# Altium PCB Y1BVER2.0.PcbDoc
Units mm, origin at the board's own origin, x right, y up, seen from the top; angles counter-clockwise.
Board outline 152.4 x 101.6 mm, 2 copper layers (Top Layer, Bottom Layer); 302 components, 252 nets, 1277 pads, 0 vias.
Unrouted connection lines stored in the file: 838.
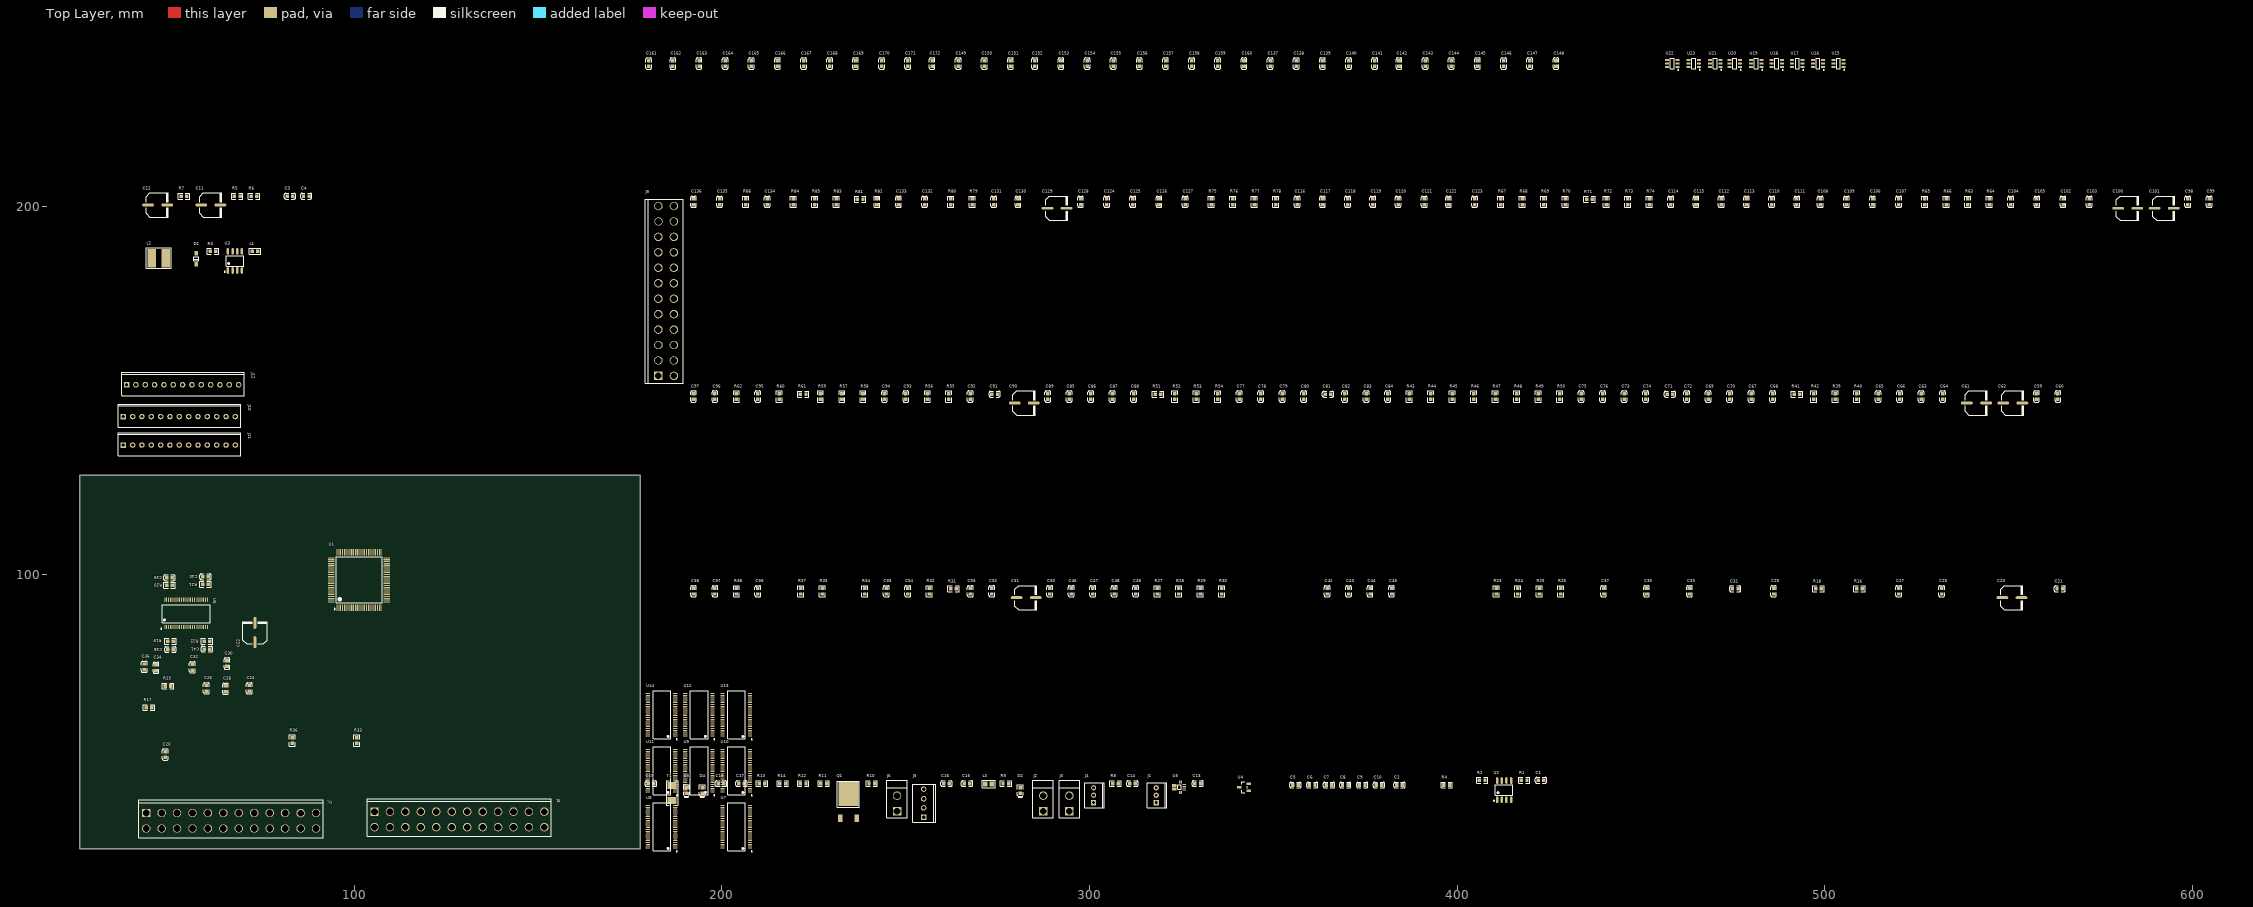
[diagram p0: Top Layer view]
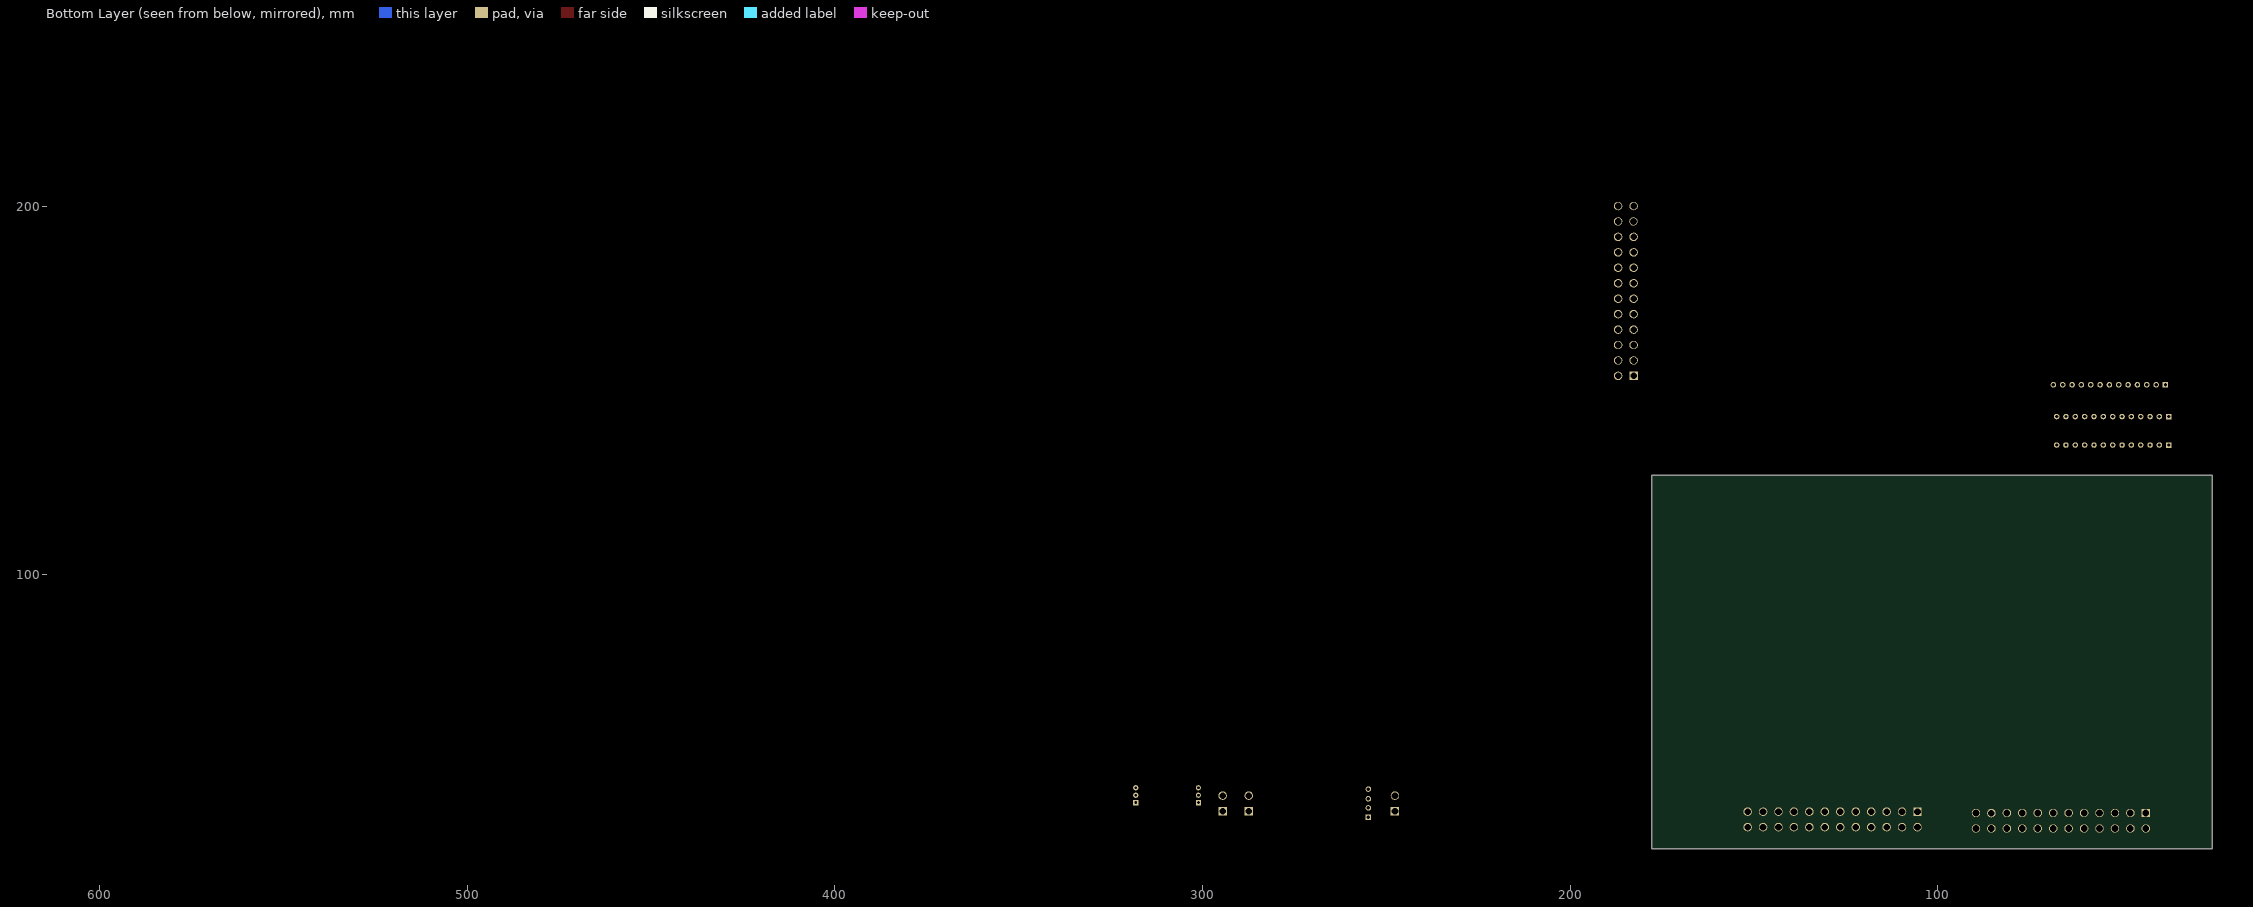
[diagram p1: Bottom Layer view, seen from below]

## Layer stack, top to bottom
Top Layer: signal copper 0.0356
Dielectric: dielectric 0.32, FR-4, Dk 4.8
Bottom Layer: signal copper 0.0356

## Board outline
25.4,25.4 177.8,25.4 177.8,127 25.4,127

## Design rules (kind name [scope] priority, off if disabled: settings)
Clearance [All] p1: gap=0.254
PolygonConnect [All] p1: connectstyle=Relief reliefconductorwidth=0.254 reliefentries=4 polygonreliefangle="90 Angle"
RoutingVias [All] p1: holewidth=0.711 width=1.27 viastyle="Through Hole" minholewidth=0.711 minwidth=1.27 maxholewidth=0.711 maxwidth=1.27
SilkscreenOverComponentPads [All] p1: minsilkscreentomaskgap=0.254
SolderMaskExpansion [All] p1: expansion=0.102
Width [All] p1: maxlimit=0.254 minlimit=0.254 preferedwidth=0.254
27 further rules are at their usual default settings.

## Classes and differential pairs
component class Y1BVER2.0: C1 C2 C3 C4 C5 C6 C7 C8 C9 C10 C11 C12 C13 C14 C15 C16 C17 C18 C19 D1 D2 D3 D4 J1 J2 J3 J4 J5 J6 L1 L2 L3 Q1 R1 R2 R3 R4 R5 R6 R7 R8 R9 R10 R11 R12 R13 R14 U1 U2 U3 U4 U5 Y1
component class Y1BVER2.0_4: C137 C138 C139 C140 C141 C142 C143 C144 C145 C146 C147 C148 C149 C150 C151 C152 C153 C154 C155 C156 C157 C158 C159 C160 C161 C162 C163 C164 C165 C166 C167 C168 C169 C170 C171 C172 J10 J11 J12 U15 U16 U17 U18 U19 U20 U21 U22 U23
component class Y1BVER2.0_3: C98 C99 C100 C101 C102 C103 C104 C105 C106 C107 C108 C109 C110 C111 C112 C113 C114 C115 C116 C117 C118 C119 C120 C121 C122 C123 C124 C125 C126 C127 C128 C129 C130 C131 C132 C133 C134 C135 C136 J9 R63 R64 R65 R66 R67 R68 R69 R70 R71 R72 R73 R74 R75 R76 R77 R78 R79 R80 R81 R82 R83 R84 R85 R86 U12 U13 U14
component class Y1BVER2.0_2: C59 C60 C61 C62 C63 C64 C65 C66 C67 C68 C69 C70 C71 C72 C73 C74 C75 C76 C77 C78 C79 C80 C81 C82 C83 C84 C85 C86 C87 C88 C89 C90 C91 C92 C93 C94 C95 C96 C97 J8 R39 R40 R41 R42 R43 R44 R45 R46 R47 R48 R49 R50 R51 R52 R53 R54 R55 R56 R57 R58 R59 R60 R61 R62 U9 U10 U11
component class Y1BVER2.0_1: C20 C21 C22 C23 C24 C25 C26 C27 C28 C29 C30 C31 C32 C33 C34 C35 C36 C37 C38 C39 C40 C41 C42 C43 C44 C45 C46 C47 C48 C49 C50 C51 C52 C53 C54 C55 C56 C57 C58 J7 R15 R16 R17 R18 R19 R20 R21 R22 R23 R24 R25 R26 R27 R28 R29 R30 R31 R32 R33 R34 R35 R36 R37 R38 U6 U7 U8

## Components (designator, comment, footprint, x,y, rotation, side; value= is the part's Value field where it differs from the comment)
C1 "100nF" 0603_C 422.783,44.069 r0 top
C2 "100nF" 0603_C 384.302,42.799 r0 top
C3 "10uF" 0603_C 82.55,202.946 r0 top
C4 "470pF" 0603_C 86.995,202.946 r0 top
C5 "100nF" 0603_C 355.981,42.799 r0 top
C6 "100nF" 0603_C 360.553,42.799 r0 top
C7 "100nF" 0603_C 365.125,42.799 r0 top
C8 "100nF" 0603_C 369.57,42.799 r0 top
C9 "100nF" 0603_C 374.142,42.799 r0 top
C10 "100nF" 0603_C 378.714,42.799 r0 top
C11 "100uf" E_6.3*5.4 58.42,200.533 r0 top
C12 "C" E_6.3*5.4 43.942,200.533 r0 top
C13 "100nF" 0603_C 329.438,43.18 r0 top
C14 "100nF" 0603_C 311.658,43.18 r0 top
C15 "10uF" 0603_C 266.7,43.18 r0 top
C16 "100nF" 0603_C 261.112,43.18 r0 top
C17 "22pF" 0603_C 205.359,43.18 r0 top
C18 "10nF" 0603_C 199.771,43.18 r0 top
C19 "22pF" 0603_C 180.721,43.18 r0 top
C20 "100nF" 0603_C 48.641,51.054 r90 top
C21 "100nF" 0603_C 563.88,96.139 r0 top
C22 "100uf" E_6.3*5.4 73.025,81.661 r90 top
C23 "100uf" E_6.3*5.4 548.259,93.726 r0 top
C24 "100nF" 0603_C 71.501,69.088 r90 top
C25 "100nF" 0603_C 531.749,95.504 r90 top
C26 "100nF" 0603_C 59.817,69.088 r90 top
C27 "100nF" 0603_C 520.065,95.504 r90 top
C28 "100nF" 0603_C 65.024,68.961 r90 top
C29 "100nF" 0603_C 486.029,95.504 r90 top
C30 "100nF" 0603_C 65.405,75.819 r90 top
C31 "100nF" 0603_C 475.615,96.139 r0 top
C32 "470nF" 0603_C 56.007,74.803 r90 top
C33 "470nF" 0603_C 463.169,95.504 r90 top
C34 "100nF" 0603_C 46.101,74.676 r90 top
C35 "100nF" 0603_C 451.485,95.504 r90 top
C36 "100nF" 0603_C 42.926,74.93 r90 top
C37 "100nF" 0603_C 439.801,95.504 r90 top
C38 "100nF" 0603_C 50.038,79.629 r180 top
C39 "100nF" 0603_C 49.784,99.187 r180 top
C40 "100nF" 0603_C 59.563,99.441 r180 top
C41 "100nF" 0603_C 59.952,79.756 r180 top
C42 "100nF" 0603_C 364.617,95.504 r90 top
C43 "100nF" 0603_C 370.459,95.504 r90 top
C44 "100nF" 0603_C 376.301,95.504 r90 top
C45 "100nF" 0603_C 382.143,95.504 r90 top
C46 "100nF" 0603_C 295.021,95.504 r90 top
C47 "100nF" 0603_C 300.863,95.504 r90 top
C48 "100nF" 0603_C 306.705,95.504 r90 top
C49 "100nF" 0603_C 312.547,95.504 r90 top
C50 "100nF" 0603_C 289.179,95.504 r90 top
C51 "100uf" E_6.3*5.4 280.162,93.726 r0 top
C52 "100nF" 0603_C 273.431,95.504 r90 top
C53 "100nF" 0603_C 267.589,95.504 r90 top
C54 "100nF" 0603_C 250.571,95.504 r90 top
C55 "100nF" 0603_C 244.729,95.504 r90 top
C56 "470nF" 0603_C 209.804,95.504 r90 top
C57 "100nF" 0603_C 198.12,95.504 r90 top
C58 "100nF" 0603_C 192.278,95.504 r90 top
C59 "100nF" 0603_C 557.53,148.463 r90 top
C60 "100nF" 0603_C 563.372,148.463 r90 top
C61 "100uf" E_6.3*5.4 538.607,146.685 r0 top
C62 "100uf" E_6.3*5.4 548.513,146.685 r0 top
C63 "100nF" 0603_C 526.161,148.463 r90 top
C64 "100nF" 0603_C 532.003,148.463 r90 top
C65 "100nF" 0603_C 514.477,148.463 r90 top
C66 "100nF" 0603_C 520.319,148.463 r90 top
C67 "100nF" 0603_C 479.933,148.463 r90 top
C68 "100nF" 0603_C 485.775,148.463 r90 top
C69 "100nF" 0603_C 468.249,148.463 r90 top
C70 "100nF" 0603_C 474.091,148.463 r90 top
C71 "470nF" 0603_C 457.835,149.098 r0 top
C72 "470nF" 0603_C 462.407,148.463 r90 top
C73 "100nF" 0603_C 445.389,148.463 r90 top
C74 "100nF" 0603_C 451.231,148.463 r90 top
C75 "100nF" 0603_C 433.705,148.463 r90 top
C76 "100nF" 0603_C 439.547,148.463 r90 top
C77 "100nF" 0603_C 340.741,148.463 r90 top
C78 "100nF" 0603_C 346.583,148.463 r90 top
C79 "100nF" 0603_C 352.425,148.463 r90 top
C80 "100nF" 0603_C 358.267,148.463 r90 top
C81 "100nF" 0603_C 364.871,149.098 r0 top
C82 "100nF" 0603_C 369.443,148.463 r90 top
C83 "100nF" 0603_C 375.285,148.463 r90 top
C84 "100nF" 0603_C 381.127,148.463 r90 top
C85 "100nF" 0603_C 294.513,148.463 r90 top
C86 "100nF" 0603_C 300.355,148.463 r90 top
C87 "100nF" 0603_C 306.197,148.463 r90 top
C88 "100nF" 0603_C 312.039,148.463 r90 top
C89 "100nF" 0603_C 288.671,148.463 r90 top
C90 "100uf" E_6.3*5.4 279.654,146.685 r0 top
C91 "100nF" 0603_C 274.193,149.098 r0 top
C92 "100nF" 0603_C 267.589,148.463 r90 top
C93 "100nF" 0603_C 250.063,148.463 r90 top
C94 "100nF" 0603_C 244.221,148.463 r90 top
C95 "470nF" 0603_C 209.804,148.463 r90 top
C96 "100nF" 0603_C 198.12,148.463 r90 top
C97 "100nF" 0603_C 192.278,148.463 r90 top
C98 "100nF" 0603_C 598.678,201.422 r90 top
C99 "100nF" 0603_C 604.52,201.422 r90 top
C100 "100uf" E_6.3*5.4 579.755,199.644 r0 top
C101 "100uf" E_6.3*5.4 589.661,199.644 r0 top
C102 "100nF" 0603_C 564.769,201.422 r90 top
C103 "100nF" 0603_C 571.881,201.422 r90 top
C104 "100nF" 0603_C 550.545,201.422 r90 top
C105 "100nF" 0603_C 557.657,201.422 r90 top
C106 "100nF" 0603_C 512.953,201.422 r90 top
C107 "100nF" 0603_C 520.065,201.422 r90 top
C108 "100nF" 0603_C 498.729,201.422 r90 top
C109 "100nF" 0603_C 505.841,201.422 r90 top
C110 "470nF" 0603_C 485.521,201.422 r90 top
C111 "470nF" 0603_C 492.379,201.422 r90 top
C112 "100nF" 0603_C 471.805,201.422 r90 top
C113 "100nF" 0603_C 478.663,201.422 r90 top
C114 "100nF" 0603_C 458.089,201.422 r90 top
C115 "100nF" 0603_C 464.947,201.422 r90 top
C116 "100nF" 0603_C 356.489,201.422 r90 top
C117 "100nF" 0603_C 363.347,201.422 r90 top
C118 "100nF" 0603_C 370.205,201.422 r90 top
C119 "100nF" 0603_C 377.063,201.422 r90 top
C120 "100nF" 0603_C 383.921,201.422 r90 top
C121 "100nF" 0603_C 391.033,201.422 r90 top
C122 "100nF" 0603_C 397.637,201.422 r90 top
C123 "100nF" 0603_C 404.749,201.422 r90 top
C124 "100nF" 0603_C 304.673,201.422 r90 top
C125 "100nF" 0603_C 311.785,201.422 r90 top
C126 "100nF" 0603_C 318.897,201.422 r90 top
C127 "100nF" 0603_C 326.009,201.422 r90 top
C128 "100nF" 0603_C 297.561,201.422 r90 top
C129 "100uf" E_6.3*5.4 288.544,199.644 r0 top
C130 "100nF" 0603_C 280.543,201.422 r90 top
C131 "100nF" 0603_C 273.939,201.422 r90 top
C132 "100nF" 0603_C 255.143,201.422 r90 top
C133 "100nF" 0603_C 248.031,201.422 r90 top
C134 "470nF" 0603_C 212.344,201.422 r90 top
C135 "100nF" 0603_C 199.39,201.422 r90 top
C136 "100nF" 0603_C 192.278,201.422 r90 top
C137 "100nF" 0603_C 349.123,239.014 r90 top
C138 "100nF" 0603_C 356.235,239.014 r90 top
C139 "100nF" 0603_C 363.347,239.014 r90 top
C140 "100nF" 0603_C 370.459,239.014 r90 top
C141 "100nF" 0603_C 377.571,239.014 r90 top
C142 "100nF" 0603_C 384.175,239.014 r90 top
C143 "100nF" 0603_C 391.287,239.014 r90 top
C144 "100nF" 0603_C 398.399,239.014 r90 top
C145 "100nF" 0603_C 405.511,239.014 r90 top
C146 "100nF" 0603_C 412.623,239.014 r90 top
C147 "100nF" 0603_C 419.735,239.014 r90 top
C148 "100nF" 0603_C 426.847,239.014 r90 top
C149 "100nF" 0603_C 264.287,239.014 r90 top
C150 "100nF" 0603_C 271.399,239.014 r90 top
C151 "100nF" 0603_C 278.511,239.014 r90 top
C152 "100nF" 0603_C 285.115,239.014 r90 top
C153 "100nF" 0603_C 292.227,239.014 r90 top
C154 "100nF" 0603_C 299.339,239.014 r90 top
C155 "100nF" 0603_C 306.451,239.014 r90 top
C156 "100nF" 0603_C 313.563,239.014 r90 top
C157 "100nF" 0603_C 320.675,239.014 r90 top
C158 "100nF" 0603_C 327.787,239.014 r90 top
C159 "100nF" 0603_C 334.899,239.014 r90 top
C160 "100nF" 0603_C 342.011,239.014 r90 top
C161 "100nF" 0603_C 180.086,239.014 r90 top
C162 "100nF" 0603_C 186.69,239.014 r90 top
C163 "100nF" 0603_C 193.802,239.014 r90 top
C164 "100nF" 0603_C 200.914,239.014 r90 top
C165 "100nF" 0603_C 208.026,239.014 r90 top
C166 "100nF" 0603_C 215.138,239.014 r90 top
C167 "100nF" 0603_C 222.25,239.014 r90 top
C168 "100nF" 0603_C 229.362,239.014 r90 top
C169 "100nF" 0603_C 236.347,239.014 r90 top
C170 "100nF" 0603_C 243.459,239.014 r90 top
C171 "100nF" 0603_C 250.571,239.014 r90 top
C172 "100nF" 0603_C 257.175,239.014 r90 top
D1 "B5819W" SOD-123 57.023,185.928 r90 top
D2 "" 0603_LED_S1 281.178,41.275 r90 top
D3 "绿灯 0603" 0603_LED_S1 190.373,41.275 r90 top
D4 "白灯 0603" 0603_LED_S1 194.691,41.275 r90 top
J1 "XH-3" ph3-2.0 318.135,37.973 r90 top
J2 "MOTOR" 5557_a 287.401,35.687 r90 top
J3 "MOTOR" 5557_a 294.513,35.687 r90 top
J4 "XH-3" ph3-2.0 301.117,37.973 r90 top
J5 "header4" xh-4 254.889,34.036 r90 top
J6 "MOTOR" 5557_a 247.65,35.687 r90 top
J7 "header24p" 5557-2*12P 43.434,35.179 r0 top
J8 "header24p" 5557-2*12P 105.537,35.56 r0 top
J9 "header24p" 5557-2*12P 182.753,154.051 r90 top
J10 "header13p" xh-13 37.211,143.002 r0 top
J11 "header13p" xh-13 37.211,135.255 r0 top
J12 "header13p" xh-13 38.1,151.638 r0 top
L1 "10uH ±10%" 0603_L 73.025,187.96 r0 top
L2 "induct" L-5*5*4 44.958,186.055 r0 top
L3 "100uH ±10%" 0805_L 272.542,43.053 r0 top
Q1 "MOSFET_N" TO-252-2 232.156,33.782 r0 top
R1 "4.7KΩ" 0603_R 418.211,44.069 r0 top
R2 "120Ω" 0603_R 406.781,44.069 r0 top
R3 "0.33" 0603_R 61.595,187.96 r0 top
R4 "4.7KΩ" 0603_R 397.129,42.799 r0 top
R5 "1.5KΩ" 0603_R 68.199,202.946 r0 top
R6 "130Ω" 0603_R 72.771,202.946 r0 top
R7 "1KΩ" 0603_R 53.721,202.946 r0 top
R8 "1MΩ" 0603_R 307.086,43.18 r0 top
R9 "3.3KΩ" 0603_R 277.241,43.18 r0 top
R10 "330Ω" 0603_R 240.792,43.18 r0 top
R11 "10KΩ" 0603_R 227.711,43.18 r0 top
R12 "1KΩ" 0603_R 222.123,43.18 r0 top
R13 "1KΩ" 0603_R 210.947,43.18 r0 top
R14 "1KΩ" 0603_R 216.535,43.18 r0 top
R15 "1KΩ" 0603_R 49.403,69.723 r0 top
R16 "1KΩ" 0603_R 509.397,96.139 r0 top
R17 "1KΩ" 0603_R 44.196,63.881 r0 top
R18 "1KΩ" 0603_R 498.221,96.139 r0 top
R19 "1Ω" 0603_R 50.038,81.915 r180 top
R20 "1Ω" 0603_R 49.784,97.155 r180 top
R21 "1Ω" 0603_R 59.563,97.409 r180 top
R22 "1Ω" 0603_R 59.952,81.915 r180 top
R23 "1Ω" 0603_R 410.591,95.504 r90 top
R24 "1Ω" 0603_R 416.433,95.504 r90 top
R25 "1Ω" 0603_R 422.275,95.504 r90 top
R26 "1Ω" 0603_R 428.117,95.504 r90 top
R27 "1Ω" 0603_R 318.389,95.504 r90 top
R28 "1Ω" 0603_R 324.231,95.504 r90 top
R29 "1Ω" 0603_R 330.073,95.504 r90 top
R30 "1Ω" 0603_R 335.915,95.504 r90 top
R31 "1KΩ" 0603_R 263.017,96.139 r0 top
R32 "1KΩ" 0603_R 256.413,95.504 r90 top
R33 "1KΩ" 0603_R 100.711,54.864 r90 top
R34 "1KΩ" 0603_R 238.887,95.504 r90 top
R35 "1KΩ" 0603_R 227.33,95.504 r90 top
R36 "1KΩ" 0603_R 83.185,54.864 r90 top
R37 "1KΩ" 0603_R 221.488,95.504 r90 top
R38 "1KΩ" 0603_R 203.962,95.504 r90 top
R39 "1KΩ" 0603_R 502.793,148.463 r90 top
R40 "1KΩ" 0603_R 508.635,148.463 r90 top
R41 "1KΩ" 0603_R 492.379,149.098 r0 top
R42 "1KΩ" 0603_R 496.951,148.463 r90 top
R43 "1Ω" 0603_R 386.969,148.463 r90 top
R44 "1Ω" 0603_R 392.811,148.463 r90 top
R45 "1Ω" 0603_R 398.653,148.463 r90 top
R46 "1Ω" 0603_R 404.495,148.463 r90 top
R47 "1Ω" 0603_R 410.337,148.463 r90 top
R48 "1Ω" 0603_R 416.179,148.463 r90 top
R49 "1Ω" 0603_R 422.021,148.463 r90 top
R50 "1Ω" 0603_R 427.863,148.463 r90 top
R51 "1Ω" 0603_R 318.643,149.098 r0 top
R52 "1Ω" 0603_R 323.215,148.463 r90 top
R53 "1Ω" 0603_R 329.057,148.463 r90 top
R54 "1Ω" 0603_R 334.899,148.463 r90 top
R55 "1KΩ" 0603_R 261.747,148.463 r90 top
R56 "1KΩ" 0603_R 255.905,148.463 r90 top
R57 "1KΩ" 0603_R 232.664,148.463 r90 top
R58 "1KΩ" 0603_R 238.379,148.463 r90 top
R59 "1KΩ" 0603_R 226.822,148.463 r90 top
R60 "1KΩ" 0603_R 215.646,148.463 r90 top
R61 "1KΩ" 0603_R 222.123,149.098 r0 top
R62 "1KΩ" 0603_R 203.962,148.463 r90 top
R63 "1KΩ" 0603_R 538.861,201.422 r90 top
R64 "1KΩ" 0603_R 544.703,201.422 r90 top
R65 "1KΩ" 0603_R 527.177,201.422 r90 top
R66 "1KΩ" 0603_R 533.019,201.422 r90 top
R67 "1Ω" 0603_R 411.861,201.422 r90 top
R68 "1Ω" 0603_R 417.703,201.422 r90 top
R69 "1Ω" 0603_R 423.545,201.422 r90 top
R70 "1Ω" 0603_R 429.387,201.422 r90 top
R71 "1Ω" 0603_R 435.991,202.057 r0 top
R72 "1Ω" 0603_R 440.563,201.422 r90 top
R73 "1Ω" 0603_R 446.405,201.422 r90 top
R74 "1Ω" 0603_R 452.247,201.422 r90 top
R75 "1Ω" 0603_R 333.121,201.422 r90 top
R76 "1Ω" 0603_R 338.963,201.422 r90 top
R77 "1Ω" 0603_R 344.805,201.422 r90 top
R78 "1Ω" 0603_R 350.647,201.422 r90 top
R79 "1KΩ" 0603_R 268.097,201.422 r90 top
R80 "1KΩ" 0603_R 262.255,201.422 r90 top
R81 "1KΩ" 0603_R 237.617,202.057 r0 top
R82 "1KΩ" 0603_R 242.189,201.422 r90 top
R83 "1KΩ" 0603_R 231.14,201.422 r90 top
R84 "1KΩ" 0603_R 219.456,201.422 r90 top
R85 "1KΩ" 0603_R 225.298,201.422 r90 top
R86 "1KΩ" 0603_R 206.502,201.422 r90 top
U1 "STM32F103VET6" LQFP-100_14x14x05P 101.346,98.552 r0 top
U2 "SP3485EN-L/TR" SOIC-8_150mil 412.75,41.402 r0 top
U3 "MC3406" SOP-8_150mil 66.675,185.674 r0 top
U4 "PSM712-LF-T7" SOT-23(SOT-23-3) 342.011,42.164 r0 top
U5 "ACS711" ACS711 325.755,42.926 r0 top
U6 "DRV8823" HTSSOP-48 48.514,85.725 r0 top
U7 "DRV8823" HTSSOP-48 207.645,25.654 r90 top
U8 "DRV8823" HTSSOP-48 187.325,25.654 r90 top
U9 "DRV8823" HTSSOP-48 197.485,40.894 r90 top
U10 "DRV8823" HTSSOP-48 207.645,40.894 r90 top
U11 "DRV8823" HTSSOP-48 187.325,40.894 r90 top
U12 "DRV8823" HTSSOP-48 197.485,56.134 r90 top
U13 "DRV8823" HTSSOP-48 207.645,56.134 r90 top
U14 "DRV8823" HTSSOP-48 187.325,56.134 r90 top
U15 "SRV05-4-P-T7" SOT-23-6 503.682,239.014 r0 top
U16 "SRV05-4-P-T7" SOT-23-6 498.094,239.014 r0 top
U17 "SRV05-4-P-T7" SOT-23-6 492.506,239.014 r0 top
U18 "SRV05-4-P-T7" SOT-23-6 486.918,239.014 r0 top
U19 "SRV05-4-P-T7" SOT-23-6 481.33,239.014 r0 top
U20 "SRV05-4-P-T7" SOT-23-6 475.488,239.014 r0 top
U21 "SRV05-4-P-T7" SOT-23-6 470.154,239.014 r0 top
U22 "SRV05-4-P-T7" SOT-23-6 458.47,239.014 r0 top
U23 "SRV05-4-P-T7" SOT-23-6 464.312,239.014 r0 top
Y1 "8MHz" SMD-5032_2P 186.436,40.64 r90 top

## Footprints (in the part's own frame and the unit in brackets; to place one, negate y for a bottom-side part, rotate by r counter-clockwise, add the part's x,y. Pads: shape width x height; smd on the part's side, far side on the other; paste and mask are expansions set on the pad)
0603_C [mm]
  rect 0.93x0.98 smd: 1(-0.77,0) 2(0.77,0)
  silkscreen extent -1.53,-0.79 1.54,0.79, body extent -0.8,-0.4 0.8,0.4, height 0.3
0603_L [mm]
  rect 0.93x0.98 smd: 1(-0.77,0) 2(0.77,0)
  silkscreen extent -1.53,-0.79 1.54,0.79, body extent -0.82,-0.41 0.83,0.41, height 0.46
0603_LED_S1 [mm]
  rect 0.93x0.98 smd: A(0.77,0) K(-0.77,0)
  silkscreen extent -1.98,-0.79 1.54,0.79, body extent -0.8,-0.4 0.8,0.4, height 0.6
0603_R [mm]
  rect 0.93x0.98 smd: 1(-0.77,0) 2(0.77,0)
  silkscreen extent -1.53,-0.79 1.54,0.79, body extent -0.85,-0.4 0.85,0.4, height 0.56
0805_L [mm]
  rect 1.16x1.47 smd: 1(-0.89,0) 2(0.89,0)
  silkscreen extent -1.77,-1.04 1.77,1.03, body extent -1.02,-0.64 1.03,0.64, height 0.6
5557-2*12P [mm]
  rect 2.3x2.3 hole 1.8: 1(0,0)
  round 2.3 hole 1.8: 2(0,-4.216) 3(4.2,0) 4(4.2,-4.216) 5(8.4,0) 6(8.4,-4.216) 7(12.6,0) 8(12.6,-4.216) 9(16.8,0) 10(16.8,-4.216) 11(21,0) 12(21,-4.216) 13(25.2,0) 14(25.2,-4.216) 15(29.4,0) 16(29.4,-4.216) 17(33.6,0) 18(33.6,-4.216) 19(37.8,0) 20(37.8,-4.216) 21(42,-0.025) 22(42,-4.216) 23(46.2,0) 24(46.2,-4.216)
  silkscreen extent -1.98,-6.76 48.11,3.56
5557_a [mm]
  rect 2.3x2.3 hole 1.8: 1(0,0)
  round 2.3 hole 1.8: 2(4.216,0)
  silkscreen extent -1.78,-2.79 8.38,2.79
ACS711 [mm]
  rect 1.27x0.8 smd: 1(-2.7,-0.25) 4(-2.7,-1.25)
  rect 0.3x0.85 smd: 5(-1.208,-2.2) 6(-0.7,-2.2) 11(-0.7,0.7) 12(-1.208,0.7)
  rect 0.85x0.3 smd: 7(0,-1.5) 8(0,-1) 9(0,-0.5) 10(0,0)
  silkscreen extent -1.73,-1.32 -0.76,-0.1
E_6.3*5.4 [mm]
  oval 3.2x0.8 smd: 1(0,0) 2(5.207,0)
  silkscreen extent -0.47,-3.3 5.53,3.3
HTSSOP-48 [mm]
  oval 0.27x1.15 smd: 1(0,0) 2(0.502,0) 3(1.005,0) 4(1.507,0) 5(2.01,0) 6(2.512,0) 7(3.015,0) 8(3.517,0) 9(4.02,0) 10(4.522,0) 11(5.025,0) 12(5.527,0) 13(6.03,0) 14(6.532,0) 15(7.035,0) 16(7.537,0) 17(8.04,0) 18(8.542,0) 19(9.045,0) 20(9.547,0) 21(10.05,0) 22(10.552,0) 23(11.055,0) 24(11.557,0) 25(11.557,7.46) 26(11.055,7.46) 27(10.552,7.46) 28(10.05,7.46) 29(9.547,7.46) 30(9.045,7.46) 31(8.542,7.46) 32(8.04,7.46) 33(7.537,7.46) 34(7.035,7.46) 35(6.532,7.46) 36(6.03,7.46) 37(5.527,7.46) 38(5.025,7.46) 39(4.522,7.46) 40(4.02,7.46) 41(3.517,7.46) 42(3.015,7.46) 43(2.512,7.46) 44(2.01,7.46) 45(1.507,7.46) 46(1.005,7.46) 47(0.502,7.46) 48(0,7.46)
  silkscreen extent -1.08,-0.6 12.32,6.02
L-5*5*4 [mm]
  rect 2.2x5 smd: 1(0,0) 2(3.81,0)
  silkscreen extent -1.52,-2.79 5.33,2.79
LQFP-100_14x14x05P [mm]
  oval 0.28x1.8 smd mask+0.051: 1(-6,-7.55) 2(-5.5,-7.55) 3(-5,-7.55) 4(-4.5,-7.55) 5(-4,-7.55) 6(-3.5,-7.55) 7(-3,-7.55) 8(-2.5,-7.55) 9(-2,-7.55) 10(-1.5,-7.55) 11(-1,-7.55) 12(-0.5,-7.55) 13(0,-7.55) 14(0.5,-7.55) 15(1,-7.55) 16(1.5,-7.55) 17(2,-7.55) 18(2.5,-7.55) 19(3,-7.55) 20(3.5,-7.55) 21(4,-7.55) 22(4.5,-7.55) 23(5,-7.55) 24(5.5,-7.55) 25(6,-7.55) 51(6,7.55) 52(5.5,7.55) 53(5,7.55) 54(4.5,7.55) 55(4,7.55) 56(3.5,7.55) 57(3,7.55) 58(2.5,7.55) 59(2,7.55) 60(1.5,7.55) 61(1,7.55) 62(0.5,7.55) 63(0,7.55) 64(-0.5,7.55) 65(-1,7.55) 66(-1.5,7.55) 67(-2,7.55) 68(-2.5,7.55) 69(-3,7.55) 70(-3.5,7.55) 71(-4,7.55) 72(-4.5,7.55) 73(-5,7.55) 74(-5.5,7.55) 75(-6,7.55)
  oval 1.8x0.28 smd mask+0.051: 26(7.55,-6) 27(7.55,-5.5) 28(7.55,-5) 29(7.55,-4.5) 30(7.55,-4) 31(7.55,-3.5) 32(7.55,-3) 33(7.55,-2.5) 34(7.55,-2) 35(7.55,-1.5) 36(7.55,-1) 37(7.55,-0.5) 38(7.55,0) 39(7.55,0.5) 40(7.55,1) 41(7.55,1.5) 42(7.55,2) 43(7.55,2.5) 44(7.55,3) 45(7.55,3.5) 46(7.55,4) 47(7.55,4.5) 48(7.55,5) 49(7.55,5.5) 50(7.55,6) 76(-7.55,6) 77(-7.55,5.5) 78(-7.55,5) 79(-7.55,4.5) 80(-7.55,4) 81(-7.55,3.5) 82(-7.55,3) 83(-7.55,2.5) 84(-7.55,2) 85(-7.55,1.5) 86(-7.55,1) 87(-7.55,0.5) 88(-7.55,0) 89(-7.55,-0.5) 90(-7.55,-1) 91(-7.55,-1.5) 92(-7.55,-2) 93(-7.55,-2.5) 94(-7.55,-3) 95(-7.55,-3.5) 96(-7.55,-4) 97(-7.55,-4.5) 98(-7.55,-5) 99(-7.55,-5.5) 100(-7.55,-6)
  silkscreen extent -6.8,-8.05 6.25,6.25
ph3-2.0 [mm]
  rect 1.4x1.4 hole 0.8: 1(0,0)
  round 1.4 hole 0.8: 2(2.032,0) 3(4.064,0)
  silkscreen extent -1.32,-2.92 5.46,2.41
SMD-5032_2P [mm]
  rect 1.9x2.4 smd: 1(-2.05,0) 2(2.05,0)
  silkscreen extent -3.32,-1.6 3.32,1.6
SOD-123 [mm]
  rect 1.25x1 smd: 1(1.475,0) 2(-1.475,0)
  silkscreen extent -0.5,-0.7 0.5,0.7, body extent -1.85,-0.77 1.85,0.78, height 1.35
SOIC-8_150mil [mm]
  oval 0.7x1.8 smd: 1(-1.905,-2.6) 2(-0.635,-2.6) 3(0.635,-2.6) 4(1.905,-2.6) 5(1.905,2.6) 6(0.635,2.6) 7(-0.635,2.6) 8(-1.905,2.6)
  silkscreen extent -2.9,-3.05 2.4,1.4
SOP-8_150mil [mm]
  oval 0.7x1.8 smd: 1(-1.008,-2.949) 2(0.262,-2.949) 3(1.532,-2.949) 4(2.802,-2.949) 5(2.802,2.251) 6(1.532,2.251) 7(0.262,2.251) 8(-1.008,2.251)
  silkscreen extent -2,-3.42 3.3,1.05, body extent -1.6,-3.45 3.4,2.75, height 1.75
SOT-23(SOT-23-3) [mm]
  rect 1.25x0.7 smd: 1(1.25,-0.95) 2(1.25,0.95) 3(-1.25,0)
  silkscreen extent -0.65,-1.46 0.9,1.46, body extent -1.5,-1.5 1.5,1.5, height 1.3
SOT-23-6 [mm]
  rect 1.1x0.6 smd: 1(1.4,-0.95) 2(1.4,0) 3(1.4,0.95) 4(-1.4,0.95) 5(-1.4,0) 6(-1.4,-0.95)
  silkscreen extent -0.5,-1.87 1.73,1.4
TO-252-2 [mm]
  rect 1.2x2 smd: 1(0,0) 3(4.56,0)
  rect 5.334x6.477 smd: 2(2.28,6.525)
  silkscreen extent -0.72,2.91 5.28,10.08
xh-4 [mm]
  rect 1.5x1.5 hole 0.9: 1(0,0)
  round 1.5 hole 0.9: 2(2.525,0) 3(5,0) 4(7.62,0)
  silkscreen extent -1.32,-3.25 8.94,2.92
xh-13 [mm]
  rect 1.5x1.5 hole 0.9: 1(0,0)
  round 1.5 hole 0.9: 2(2.54,0) 3(5.08,0) 4(7.62,0) 5(10.16,0) 6(12.7,0) 7(15.24,0) 8(17.78,0) 9(20.32,0) 10(22.86,0) 11(25.4,0) 12(27.94,0) 13(30.48,0)
  silkscreen extent -1.32,-2.92 32,3.38

## Part data
C1 C2 C5 C6 C7 C8 C9 C10 C13 C14 C16 C20 C21 C24 C25 C26 C27 C28 C29 C30 C31 C34 C35 C36 C37 C38 C39 C40 C41 C42 C43 C44 C45 C46 C47 C48 C49 C50 C52 C53 C54 C55 C57 C58 C59 C60 C63 C64 C65 C66 C67 C68 C69 C70 C73 C74 C75 C76 C77 C78 C79 C80 C81 C82 C83 C84 C85 C86 C87 C88 C89 C91 C92 C93 C94 C96 C97 C98 C99 C102 C103 C104 C105 C106 C107 C108 C109 C112 C113 C114 C115 C116 C117 C118 C119 C120 C121 C122 C123 C124 C125 C126 C127 C128 C130 C131 C132 C133 C135 C136 C137 C138 C139 C140 C141 C142 C143 C144 C145 C146 C147 C148 C149 C150 C151 C152 C153 C154 C155 C156 C157 C158 C159 C160 C161 C162 C163 C164 C165 C166 C167 C168 C169 C170 C171 C172: library part "0603 100nF (104) 10% 50V", "Ì"
C3 C15: library part "0603 10uF (106) 10% 10V", "Ì"
C4: library part "0603 470pF (471) 10% 50V", "Ì"
C17 C19: library part "0603 22pF (220) 5% 50V", "ÌùÆ"
C18: library part "0603 10nF (103) 10% 50V", "Ì"
C32 C33 C56 C71 C72 C95 C110 C111 C134: library part "0603 470nF (474) 10% 25V", "Ì"
D1: library part "SOD-123 B5819W  SL", "Ð¤ÌØ»"
D2: library part "0603 红灯"
D3: library part "0603 绿灯"
D4: library part "0603 白灯"
L1: library part "0603 10uH 10%", "Ì"
L3: library part "0805 100uH 10%", "ÌùÆ"
R1 R4: library part "0603 4.7KΩ (4701) 1%"
R2: library part "0603 120Ω (1200) 1%"
R3 R7 R12 R13 R14 R15 R16 R17 R18 R31 R32 R33 R34 R35 R36 R37 R38 R39 R40 R41 R42 R55 R56 R57 R58 R59 R60 R61 R62 R63 R64 R65 R66 R79 R80 R81 R82 R83 R84 R85 R86: library part "0603 1KΩ (1001) 1%"
R5: library part "0603 1.5KΩ (1501) 1%"
R6: library part "0603 130Ω (1300) 1%"
R8: library part "0603 1MΩ (1004) 1%"
R9: library part "0603 3.3KΩ (3301) 1%"
R10: library part "0603 330Ω (3300) 1%"
R11: library part "0603 10KΩ (1002) 1%"
R19 R20 R21 R22 R23 R24 R25 R26 R27 R28 R29 R30 R43 R44 R45 R46 R47 R48 R49 R50 R51 R52 R53 R54 R67 R68 R69 R70 R71 R72 R73 R74 R75 R76 R77 R78: library part "0603 1Ω (1R00) 1%"
U2: library part SP3485EN-L/TR_[C8963], "RS-485/RS-42"
U3: library part MC
U4: library part PSM712-LF-T7_[C32677]
U5: library part A
U15 U16 U17 U18 U19 U20 U21 U22 U23: library part SRV05-4-P-T7_[C85364]
Y1: library part "SMD-5032_2P 8MHz 20ppm 20pF", "ÌùÆ"

## Nets (pads, with @x,y where several pads share a name; then routed paths per layer and width w, separated by ;. In a path a pad name is that pad's centre, name@x,y a point inside that pad or via, vN(x,y) a via of type N, cw(c..) or ccw(c..) an arc to the next point about the centre after c; other vN are vias at no path point)
485_A: J1.3 J4.3 R2.2 R4.2 U2.6 U4.1
485_B: J1.2 J4.2 R1.1 R2.1 U2.7 U4.2
485_EN: U1.63 U2.2 U2.3
485_RX: U1.69 U2.1
485_TX: U1.68 U2.4
ACSOUT: U5.11
D1ABVREF: R33.2 U6.17
D1AISEN: C38.2 R19.2 U6.4
D1AOUT1: C26.1 J7.1 U6.5
D1AOUT2: C26.2 J7.2 U6.3
D1BISEN: C39.2 R20.2 U6.47
D1BOUT1: C20.1 J7.3 U6.48
D1BOUT2: C20.2 J7.4 U6.46
D1CDVREF: R36.2 U6.18
D1CISEN: C40.2 R21.2 U6.26
D1COUT1: C36.1 J7.5 U6.27
D1COUT2: C36.2 J7.6 U6.25
D1DISEN: C41.2 R22.2 U6.21
D1DOUT1: C34.1 J7.7 U6.22
D1DOUT2: C34.2 J7.8 U6.20
D2ABVREF: R35.2 U7.17
D2AISEN: C46.2 R27.2 U7.4
D2AOUT1: C27.1 J7.9 U7.5
D2AOUT2: C27.2 J7.10 U7.3
D2BISEN: C47.2 R28.2 U7.47
D2BOUT1: C21.1 J7.11 U7.48
D2BOUT2: C21.2 J7.12 U7.46
D2CDVREF: R38.2 U7.18
D2CISEN: C48.2 R29.2 U7.26
D2COUT1: C37.1 J7.13 U7.27
D2COUT2: C37.2 J7.14 U7.25
D2DISEN: C49.2 R30.2 U7.21
D2DOUT1: C35.1 J7.15 U7.22
D2DOUT2: C35.2 J7.16 U7.20
D3ABVREF: R34.2 U8.17
D3AISEN: C42.2 R23.2 U8.4
D3AOUT1: C53.1 J7.17 U8.5
D3AOUT2: C53.2 J7.18 U8.3
D3BISEN: C43.2 R24.2 U8.47
D3BOUT1: C50.1 J7.19 U8.48
D3BOUT2: C50.2 J7.20 U8.46
D3CDVREF: R37.2 U8.18
D3CISEN: C44.2 R25.2 U8.26
D3COUT1: C58.1 J7.21 U8.27
D3COUT2: C58.2 J7.22 U8.25
D3DISEN: C45.2 R26.2 U8.21
D3DOUT1: C57.1 J7.23 U8.22
D3DOUT2: C57.2 J7.24 U8.20
D4ABVREF: R57.2 U9.17
D4AISEN: C77.2 R43.2 U9.4
D4AOUT1: C65.1 J8.1 U9.5
D4AOUT2: C65.2 J8.2 U9.3
D4BISEN: C78.2 R44.2 U9.47
D4BOUT1: C59.1 J8.3 U9.48
D4BOUT2: C59.2 J8.4 U9.46
D4CDVREF: R60.2 U9.18
D4CISEN: C79.2 R45.2 U9.26
D4COUT1: C75.1 J8.5 U9.27
D4COUT2: C75.2 J8.6 U9.25
D4DISEN: C80.2 R46.2 U9.21
D4DOUT1: C73.1 J8.7 U9.22
D4DOUT2: C73.2 J8.8 U9.20
D5ABVREF: R59.2 U10.17
D5AISEN: C85.2 R51.2 U10.4
D5AOUT1: C66.1 J8.9 U10.5
D5AOUT2: C66.2 J8.10 U10.3
D5BISEN: C86.2 R52.2 U10.47
D5BOUT1: C60.1 J8.11 U10.48
D5BOUT2: C60.2 J8.12 U10.46
D5CDVREF: R62.2 U10.18
D5CISEN: C87.2 R53.2 U10.26
D5COUT1: C76.1 J8.13 U10.27
D5COUT2: C76.2 J8.14 U10.25
D5DISEN: C88.2 R54.2 U10.21
D5DOUT1: C74.1 J8.15 U10.22
D5DOUT2: C74.2 J8.16 U10.20
D6ABVREF: R58.2 U11.17
D6AISEN: C81.2 R47.2 U11.4
D6AOUT1: C92.1 J8.17 U11.5
D6AOUT2: C92.2 J8.18 U11.3
D6BISEN: C82.2 R48.2 U11.47
D6BOUT1: C89.1 J8.19 U11.48
D6BOUT2: C89.2 J8.20 U11.46
D6CDVREF: R61.2 U11.18
D6CISEN: C83.2 R49.2 U11.26
D6COUT1: C97.1 J8.21 U11.27
D6COUT2: C97.2 J8.22 U11.25
D6DISEN: C84.2 R50.2 U11.21
D6DOUT1: C96.1 J8.23 U11.22
D6DOUT2: C96.2 J8.24 U11.20
D7ABVREF: R81.2 U12.17
D7AISEN: C116.2 R67.2 U12.4
D7AOUT1: C104.1 J9.1 U12.5
D7AOUT2: C104.2 J9.2 U12.3
D7BISEN: C117.2 R68.2 U12.47
D7BOUT1: C98.1 J9.3 U12.48
D7BOUT2: C98.2 J9.4 U12.46
D7CDVREF: R84.2 U12.18
D7CISEN: C118.2 R69.2 U12.26
D7COUT1: C114.1 J9.5 U12.27
D7COUT2: C114.2 J9.6 U12.25
D7DISEN: C119.2 R70.2 U12.21
D7DOUT1: C112.1 J9.7 U12.22
D7DOUT2: C112.2 J9.8 U12.20
D8ABVREF: R83.2 U13.17
D8AISEN: C124.2 R75.2 U13.4
D8AOUT1: C105.1 J9.9 U13.5
D8AOUT2: C105.2 J9.10 U13.3
D8BISEN: C125.2 R76.2 U13.47
D8BOUT1: C99.1 J9.11 U13.48
D8BOUT2: C99.2 J9.12 U13.46
D8CDVREF: R86.2 U13.18
D8CISEN: C126.2 R77.2 U13.26
D8COUT1: C115.1 J9.13 U13.27
D8COUT2: C115.2 J9.14 U13.25
D8DISEN: C127.2 R78.2 U13.21
D8DOUT1: C113.1 J9.15 U13.22
D8DOUT2: C113.2 J9.16 U13.20
D9ABVREF: R82.2 U14.17
D9AISEN: C120.2 R71.2 U14.4
D9AOUT1: C131.1 J9.17 U14.5
D9AOUT2: C131.2 J9.18 U14.3
D9BISEN: C121.2 R72.2 U14.47
D9BOUT1: C128.1 J9.19 U14.48
D9BOUT2: C128.2 J9.20 U14.46
D9CDVREF: R85.2 U14.18
D9CISEN: C122.2 R73.2 U14.26
D9COUT1: C136.1 J9.21 U14.27
D9COUT2: C136.2 J9.22 U14.25
D9DISEN: C123.2 R74.2 U14.21
D9DOUT1: C135.1 J9.23 U14.22
D9DOUT2: C135.2 J9.24 U14.20
D_EN: J6.2 Q1.2
GND: C1.1 C2.2 C4.2 C5.1 C6.1 C7.1 C8.1 C9.1 C10.1 C13.2 C14.2 C15.1 C16.1 C17.1 C18.1 C19.1 C38.1 C39.1 C40.1 C41.1 C42.1 C43.1 C44.1 C45.1 C46.1 C47.1 C48.1 C49.1 C77.1 C78.1 C79.1 C80.1 C81.1 C82.1 C83.1 C84.1 C85.1 C86.1 C87.1 C88.1 C116.1 C117.1 C118.1 C119.1 C120.1 C121.1 C122.1 C123.1 C124.1 C125.1 C126.1 C127.1 C137.2 C138.2 C139.2 C140.2 C141.2 C142.2 C143.2 C144.2 C145.2 C146.2 C147.2 C148.2 C149.2 C150.2 C151.2 C152.2 C153.2 C154.2 C155.2 C156.2 C157.2 C158.2 C159.2 C160.2 C161.2 C162.2 C163.2 C164.2 C165.2 C166.2 C167.2 C168.2 C169.2 C170.2 C171.2 C172.2 D1.1 D4.K J1.1 J2.2 J3.2 J4.1 J5.4 J10.13 J11.13 J12.13 Q1.3 R1.2 R7.1 R8.2 R12.2 R19.1 R20.1 R21.1 R22.1 R23.1 R24.1 R25.1 R26.1 R27.1 R28.1 R29.1 R30.1 R43.1 R44.1 R45.1 R46.1 R47.1 R48.1 R49.1 R50.1 R51.1 R52.1 R53.1 R54.1 R67.1 R68.1 R69.1 R70.1 R71.1 R72.1 R73.1 R74.1 R75.1 R76.1 R77.1 R78.1 U1.10 U1.19 U1.20 U1.27 U1.49 U1.74 U1.99 U2.5 U3.4 U4.3 U5.5 U6.34 U6.35 U6.36 U6.37 U6.38 U6.39 U7.34 U7.35 U7.36 U7.37 U7.38 U7.39 U8.34 U8.35 U8.36 U8.37 U8.38 U8.39 U9.34 U9.35 U9.36 U9.37 U9.38 U9.39 U10.34 U10.35 U10.36 U10.37 U10.38 U10.39 U11.34 U11.35 U11.36 U11.37 U11.38 U11.39 U12.34 U12.35 U12.36 U12.37 U12.38 U12.39 U13.34 U13.35 U13.36 U13.37 U13.38 U13.39 U14.34 U14.35 U14.36 U14.37 U14.38 U14.39 U15.2 U16.2 U17.2 U18.2 U19.2 U20.2 U21.2 U22.2 U23.2
LED1: D3.K U1.29
M_EN: R10.1
NetC3_1: C3.1 C11.2 C12.2
NetC4_1: C4.1 U3.3
NetC12_1: C12.1 L1.2 L2.1 R5.1
NetC28_1: C28.1 U6.8
NetC28_2: C28.2 U6.7
NetC29_1: C29.1 U7.8
NetC29_2: C29.2 U7.7
NetC30_2: C30.2 U6.9
NetC31_2: C31.2 U7.9
NetC32_2: C32.2 U6.16
NetC33_2: C33.2 U7.16
NetC54_1: C54.1 U8.8
NetC54_2: C54.2 U8.7
NetC55_2: C55.2 U8.9
NetC56_2: C56.2 U8.16
NetC67_1: C67.1 U9.8
NetC67_2: C67.2 U9.7
NetC68_1: C68.1 U10.8
NetC68_2: C68.2 U10.7
NetC69_2: C69.2 U9.9
NetC70_2: C70.2 U10.9
NetC71_2: C71.2 U9.16
NetC72_2: C72.2 U10.16
NetC93_1: C93.1 U11.8
NetC93_2: C93.2 U11.7
NetC94_2: C94.2 U11.9
NetC95_2: C95.2 U11.16
NetC106_1: C106.1 U12.8
NetC106_2: C106.2 U12.7
NetC107_1: C107.1 U13.8
NetC107_2: C107.2 U13.7
NetC108_2: C108.2 U12.9
NetC109_2: C109.2 U13.9
NetC110_2: C110.2 U12.16
NetC111_2: C111.2 U13.16
NetC132_1: C132.1 U14.8
NetC132_2: C132.2 U14.7
NetC133_2: C133.2 U14.9
NetC134_2: C134.2 U14.16
NetD1_2: D1.2 L2.2 U3.2
NetD2_A: D2.A R9.1
NetD2_K: D2.K U5.6
NetD3_A: D3.A R13.1
NetD4_A: D4.A R14.1
NetQ1_1: Q1.1 R10.2
NetR3_1: R3.1 U3.1 U3.7 U3.8
NetR5_2: R5.2 R6.1
NetR6_2: R6.2 R7.2 U3.5
NetR12_1: R12.1 U1.94
NetR15_1: R15.1 U6.45
NetR16_1: R16.1 U7.45
NetR17_1: R17.1 U6.43
NetR18_1: R18.1 U7.43
NetR31_1: R31.1 U8.45
NetR32_1: R32.1 U8.43
NetR39_1: R39.1 U9.45
NetR40_1: R40.1 U10.45
NetR41_1: R41.1 U9.43
NetR42_1: R42.1 U10.43
NetR55_1: R55.1 U11.45
NetR56_1: R56.1 U11.43
NetR63_1: R63.1 U12.45
NetR64_1: R64.1 U13.45
NetR65_1: R65.1 U12.43
NetR66_1: R66.1 U13.43
NetR79_1: R79.1 U14.45
NetR80_1: R80.1 U14.43
NRST: C18.2 R11.1 U1.14
OSC_IN: C19.2 U1.12 Y1.1
OSC_OUT: C17.2 U1.13 Y1.2
PGND: C22.2 C23.2 C24.1 C25.1 C32.1 C33.1 C51.2 C52.1 C56.1 C61.2 C62.2 C63.1 C64.1 C71.1 C72.1 C90.2 C91.1 C95.1 C100.2 C101.2 C102.1 C103.1 C110.1 C111.1 C129.2 C130.1 C134.1 U6.10 U6.11 U6.12 U6.13 U6.14 U6.15 U7.10 U7.11 U7.12 U7.13 U7.14 U7.15 U8.10 U8.11 U8.12 U8.13 U8.14 U8.15 U9.10 U9.11 U9.12 U9.13 U9.14 U9.15 U10.10 U10.11 U10.12 U10.13 U10.14 U10.15 U11.10 U11.11 U11.12 U11.13 U11.14 U11.15 U12.10 U12.11 U12.12 U12.13 U12.14 U12.15 U13.10 U13.11 U13.12 U13.13 U13.14 U13.15 U14.10 U14.11 U14.12 U14.13 U14.14 U14.15
S1: C161.1 J12.1 U15.1
S2: C162.1 J12.2 U16.1
S3: C163.1 J12.3 U17.1
S4: C164.1 J12.4 U18.1
S5: C165.1 J12.5 U19.1
S6: C166.1 J12.6 U20.1
S7: C167.1 J12.7 U21.3
S8: C168.1 J12.8 U21.1
S9: C169.1 J12.9 U22.3
S10: C170.1 J12.10 U22.1
S11: C171.1 J12.11 U23.3
S12: C172.1 J12.12 U23.1
S13: C149.1 J10.1 U15.3
S14: C150.1 J10.2 U16.3
S15: C151.1 J10.3 U17.3
S16: C152.1 J10.4 U18.3
S17: C153.1 J10.5 U19.3
S18: C154.1 J10.6 U20.3
S19: C155.1 J10.7 U21.4
S20: C156.1 J10.8 U21.6
S21: C157.1 J10.9 U22.4
S22: C158.1 J10.10 U22.6
S23: C159.1 J10.11 U23.4
S24: C160.1 J10.12 U23.6
S25: C137.1 J11.1 U15.4
S26: C138.1 J11.2 U15.6
S27: C139.1 J11.3 U16.4
S28: C140.1 J11.4 U16.6
S29: C141.1 J11.5 U17.4
S30: C142.1 J11.6 U17.6
S31: C143.1 J11.7 U18.4
S32: C144.1 J11.8 U18.6
S33: C145.1 J11.9 U19.4
S34: C146.1 J11.10 U19.6
S35: C147.1 J11.11 U20.4
S36: C148.1 J11.12 U20.6
SGND0: C14.1
SGND1: R8.1
SWCLK: J5.3 U1.76
SWDIO: J5.2 U1.72
VCC3V3: C2.1 C3.2 C5.2 C6.2 C7.2 C8.2 C9.2 C10.2 C13.1 J5.1 L1.1 L3.1 R4.1 R11.2 R13.2 R14.2 R15.2 R16.2 R17.2 R18.2 R31.2 R32.2 R33.1 R34.1 R35.1 R36.1 R37.1 R38.1 R39.2 R40.2 R41.2 R42.2 R55.2 R56.2 R57.1 R58.1 R59.1 R60.1 R61.1 R62.1 R63.2 R64.2 R65.2 R66.2 R79.2 R80.2 R81.1 R82.1 R83.1 R84.1 R85.1 R86.1 U1.6 U1.11 U1.28 U1.50 U1.75 U1.100 U2.8 U5.12 U15.5 U16.5 U17.5 U18.5 U19.5 U20.5 U21.5 U22.5 U23.5
VCC24V: C11.1 C22.1 C23.1 C24.2 C25.2 C30.1 C31.1 C51.1 C52.2 C55.1 C61.1 C62.1 C63.2 C64.2 C69.1 C70.1 C90.1 C91.2 C94.1 C100.1 C101.1 C102.2 C103.2 C108.1 C109.1 C129.1 C130.2 C133.1 J6.1 R3.2 U3.6 U5.4 U6.1 U6.2 U6.23 U6.24 U7.1 U7.2 U7.23 U7.24 U8.1 U8.2 U8.23 U8.24 U9.1 U9.2 U9.23 U9.24 U10.1 U10.2 U10.23 U10.24 U11.1 U11.2 U11.23 U11.24 U12.1 U12.2 U12.23 U12.24 U13.1 U13.2 U13.23 U13.24 U14.1 U14.2 U14.23 U14.24
VCC24VA: J2.1 J3.1 U5.1
"VCC 3V3": R9.2
VDDA: C1.2 C15.2 C16.2 L3.2 U1.21 U1.22
pads on no net: U1.1 U1.2 U1.3 U1.4 U1.5 U1.7 U1.8 U1.9 U1.15 U1.16 U1.17 U1.18 U1.23 U1.24 U1.25 U1.26 U1.30 U1.31 U1.32 U1.33 U1.34 U1.35 U1.36 U1.37 U1.38 U1.39 U1.40 U1.41 U1.42 U1.43 U1.44 U1.45 U1.46 U1.47 U1.48 U1.51 U1.52 U1.53 U1.54 U1.55 U1.56 U1.57 U1.58 U1.59 U1.60 U1.61 U1.62 U1.64 U1.65 U1.66 U1.67 U1.70 U1.71 U1.73 U1.77 U1.78 U1.79 U1.80 U1.81 U1.82 U1.83 U1.84 U1.85 U1.86 U1.87 U1.88 U1.89 U1.90 U1.91 U1.92 U1.93 U1.95 U1.96 U1.97 U1.98 U5.7 U5.8 U5.9 U5.10 U6.6 U6.19 U6.28 U6.29 U6.30 U6.31 U6.32 U6.33 U6.40 U6.41 U6.42 U6.44 U7.6 U7.19 U7.28 U7.29 U7.30 U7.31 U7.32 U7.33 U7.40 U7.41 U7.42 U7.44 U8.6 U8.19 U8.28 U8.29 U8.30 U8.31 U8.32 U8.33 U8.40 U8.41 U8.42 U8.44 U9.6 U9.19 U9.28 U9.29 U9.30 U9.31 U9.32 U9.33 U9.40 U9.41 U9.42 U9.44 U10.6 U10.19 U10.28 U10.29 U10.30 U10.31 U10.32 U10.33 U10.40 U10.41 U10.42 U10.44 U11.6 U11.19 U11.28 U11.29 U11.30 U11.31 U11.32 U11.33 U11.40 U11.41 U11.42 U11.44 U12.6 U12.19 U12.28 U12.29 U12.30 U12.31 U12.32 U12.33 U12.40 U12.41 U12.42 U12.44 U13.6 U13.19 U13.28 U13.29 U13.30 U13.31 U13.32 U13.33 U13.40 U13.41 U13.42 U13.44 U14.6 U14.19 U14.28 U14.29 U14.30 U14.31 U14.32 U14.33 U14.40 U14.41 U14.42 U14.44